# EAGLE board pick&place (EAGLE 9.4.2)
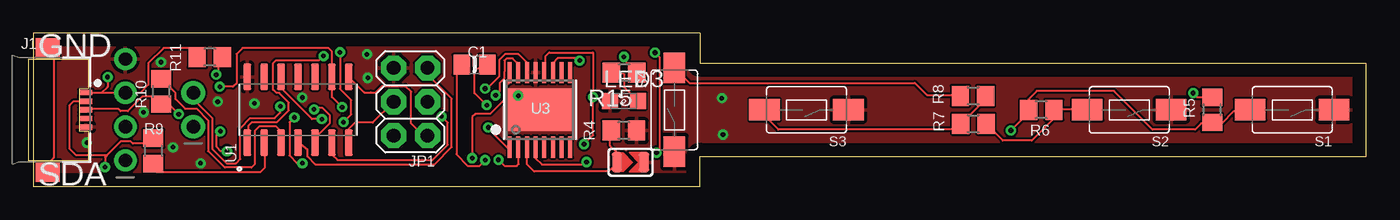
[diagram p0: board, top side]
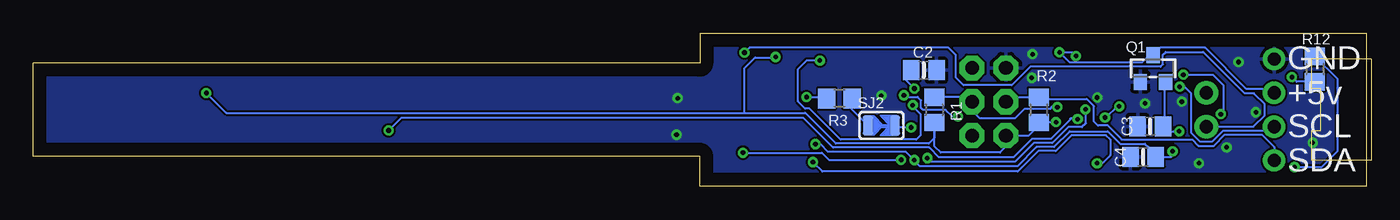
[diagram p1: board, bottom side, seen from below]

Size 100 x 11.5 mm. Coordinates in mm from the lower left corner, seen from the top.
Outline: 0,0 50,0 50,2.25 100,2.25 100,9.25 50,9.25 50,11.5 0,11.5 0,0
Copper layers (1*16): Top 0.035mm / dielectric 1.5mm / Bottom 0.035mm
Design rules "default": minimum track width 6mil, minimum drill 0.35mm, track to track 6mil, track to pad 6mil, pad to pad 6mil, via to via 6mil, smd to smd 6mil, copper to edge 40mil, drill to drill 6mil, minimum pad ring 10mil, minimum via ring 8mil, stop-mask expansion 4mil, vias tented up to drill 0mil, thermal gap 10mil
Net classes: 2 gnd: width 0.254 mm, drill 0.356 mm, clearance 0.127 mm

## Footprints (pad centres in the part's own frame; a part is rotated, then mirrored left to right if it is on the bottom)
0805-NO = smd 1.24 x 1.5: 1 -0.95,0; 2 0.95,0
GCT_USB3070-XX-X_REVE = smd 0.4 x 1: 1 -1.3,2.85; 2 -0.65,2.85; 3 0,2.85; 4 0.65,2.85; 5 1.3,2.85 | smd 1.6 x 1.8: 6 4.6,0; 7 -4.6,0
2X03 = drill 1.016 pad 1.88 octagon: 1 -2.54,-1.27; 2 -2.54,1.27; 3 0,-1.27; 4 0,1.27; 5 2.54,-1.27; 6 2.54,1.27
1X04_ROUND = drill 1 pad 1.676: 1 -3.81,0; 2 -1.27,0; 3 1.27,0; 4 3.81,0
1X02_ROUND = drill 1 pad 1.778: 1 -1.27,0; 2 1.27,0
SML0805 = smd 1.2 x 1.2: A 1.05,0; C -1.05,0
SOT23-WIDE = smd 1 x 1.2: 1 -0.95,-1; 2 0.95,-1; 3 0,1
R0805 = smd 1.3 x 1.5: 1 -0.95,0; 2 0.95,0
TACTILE-SWITCH-1101NE = smd 2.3 x 1.6: P$1 -3.15,0; P$2 3.15,0
SOLDERJUMPER_ARROW_NOPASTE = smd 0.762 x 1.524: 1 -1.016,0; 2 1.016,0
SOIC127P599X175-14N = smd 1.97 x 0.59: 1 -2.47,3.81; 2 -2.47,2.54; 3 -2.47,1.27; 4 -2.47,0; 5 -2.47,-1.27; 6 -2.47,-2.54; 7 -2.47,-3.81; 8 2.47,-3.81; 9 2.47,-2.54; 10 2.47,-1.27; 11 2.47,0; 12 2.47,1.27; 13 2.47,2.54; 14 2.47,3.81
HTSSOP16 = smd 0.3 x 1.6: 1 -2.275,-2.8; 2 -1.625,-2.8; 3 -0.975,-2.8; 4 -0.325,-2.8; 5 0.325,-2.8; 6 0.975,-2.8; 7 1.625,-2.8; 8 2.275,-2.8; 9 2.275,2.8; 10 1.625,2.8; 11 0.975,2.8; 12 0.325,2.8; 13 -0.325,2.8; 14 -0.975,2.8; 15 -1.625,2.8; 16 -2.275,2.8 | smd 4.8 x 3.2: PPAD 0,0

## Placement (x,y rotation side)
C1  0.1uF  [0805-NO]  33.1,9.13 0 top
C2  10µF  [0805-NO]  33.19,8.72 0 bottom
C3  10µF/16V  [0805-NO]  16.2,4.5 180 bottom
C4  10µF/16V  [0805-NO]  16.73,2.21 180 bottom
J1  USB3070-XX-X_REVE  [GCT_USB3070-XX-X_REVE]  1.09,5.75 270 top
JP1  [2X03]  28.3,6.35 90 top
JP3  [1X04_ROUND]  6.9,5.75 90 top
JP4  [1X02_ROUND]  12,5.75 90 top
LED3  [SML0805]  44.3,6.41 0 top
Q1  DMG3415U  [SOT23-WIDE]  16,8.85 0 bottom
R1  10k  [R0805]  32.4,5.75 270 bottom
R2  10k  [R0805]  24.57,5.75 270 bottom
R3  10k  [R0805]  39.52,6.6 180 bottom
R4  0.2Ω  [R0805]  44.3,4.19 180 top
R5  2.2k  [R0805]  88.44,5.75 90 top
R6  330  [R0805]  75.62,5.75 180 top
R7  680  [R0805]  70.53,4.7 0 top
R8  1k  [R0805]  70.5,6.8 0 top
R9  68  [R0805]  9,2.65 270 top
R10  68  [R0805]  9.61,7.13 90 top
R11  10k  [R0805]  13.24,9.71 180 top
R12  10k  [R0805]  3.84,8.81 270 bottom
R15  330  [R0805]  44.32,8.53 180 top
S1  Forward  [TACTILE-SWITCH-1101NE]  94.44,5.75 180 top
S2  Backward  [TACTILE-SWITCH-1101NE]  82.22,5.75 180 top
S3  Config  [TACTILE-SWITCH-1101NE]  58,5.75 180 top
S4  SWITCH-MOMENTARY-2-SMD-1101NE  [TACTILE-SWITCH-1101NE]  48.1,5.75 90 top
SJ1  ISENSEA  [SOLDERJUMPER_ARROW_NOPASTE]  44.8,1.8 0 top
SJ2  ISENSEA  [SOLDERJUMPER_ARROW_NOPASTE]  36.37,4.57 0 bottom
U1  ATTINY841-SSU  [SOIC127P599X175-14N]  19.86,5.75 90 top
U3  DRV8833PWPR  [HTSSOP16]  38,5.75 0 top

## Library data of the parts
C1-C4 JP3 JP4 Q1 U3 = microbuilder
J1 = USB3070-XX-X_REVE; AVAILABILITY: Warning; DESCRIPTION: USB - micro B USB 2.0 Receptacle Connector 5 Position Board Edge, Cutout; Surface Mount, Right Angle; MF: Global Connector Technology; MP: USB3070-30-A; PACKAGE: None; PRICE: None; PURCHASE-URL: https://pricing.snapeda.com/search/part/USB3070-30-A/?ref=eda
JP1 S1-S4 = SparkFun
LED3 = led
R1-R12 R15 = rcl
SJ1 SJ2 = microbuilder; BOM: EXCLUDE
U1 = ATTINY841-SSU; AVAILABILITY: Good; DESCRIPTION: AVR AVR® ATtiny Microcontroller IC 8-Bit 16MHz 8KB (8K x 8) FLASH 14-SOIC; MF: Microchip; MP: ATTINY841-SSU; PACKAGE: SOIC-14 Microchip; PRICE: None; PURCHASE-URL: https://pricing.snapeda.com/search/part/ATTINY841-SSU/?ref=eda

## Nets
!SLEEP: SJ2.2 U3.1
+5V: J1.1 JP1.2 JP3.3 Q1.3 R1.2 R2.2 R5.2 R11.2 R12.2 R15.1 U1.1
ADC1: R5.1 R6.2 S1.P$2 U1.12
AOUT1: JP4.1 U3.2
AOUT2: JP4.2 U3.4
ASEN: R4.2 SJ1.1 U3.3
D+: J1.3 R10.1 R11.1
D-: J1.2 R9.1 R12.1
ENC_A: U1.11
ENC_B: U1.10
GND: C2.2 C3.2 C4.2 J1.5 JP1.6 JP3.4 LED3.C Q1.1 R4.1 S1.P$1 S2.P$1 S3.P$1 S4.P$1 SJ1.2 U1.14 U3.13 U3.PPAD
IN1_A: U1.5 U3.16
IN2_A: U1.6 U3.15
MISO: JP1.1 U1.8
N$1: R3.1 SJ2.1
N$3: R9.2 U1.2
N$4: R10.2 U1.3
N$8: C1.2 U3.11
N$9: R7.1 R8.2 S3.P$2
N$12: LED3.A R15.2
N$14: R6.1 R7.2 S2.P$2
NFAULT: U3.8
RESET: JP1.5 U1.4
S4: R8.1 S4.P$2
SCL: JP1.3 JP3.2 R1.1 U1.9
SDA: JP1.4 JP3.1 R2.1 U1.7
SHIELD: J1.6 J1.7
VINT: C2.1 U3.14
VMOTOR: C1.1 C3.1 C4.1 Q1.2 R3.2 U3.12

## Tracks (layer width: path | path; a pad name or v marks a point on that pad's centre or on a via)
!SLEEP  (via drill 0.35)
  Top 0.152: U3.1 35.51,2.95 34.09,4.37 v34.13,4.42
  Bottom 0.152: v34.13,4.42 35.2,4.42 SJ2.2
+5V  (via drill 0.35)
  Top 0.152: 5.11,7.01 6.86,7.01 JP3.3 8.02,7.02 8.63,7.64 8.63,9.25 9.77,10.39 11.61,10.39 R11.2 | 5.11,7.01 3.96,7.01 J1.1 | v87.02,7.01 87.33,6.71 88.39,6.71 R5.2 | U1.1 16.15,3.35 16.15,4.56 16.41,4.82 18.28,4.82 19.17,5.7 19.17,6.28 18.44,7.01 18.24,7.01 17.98,7.27 17.96,7.27 17.96,9.21 18.2,9.45 21.42,9.45 v21.77,9.79 | v23.01,10.07 23.01,7.32 23.85,6.48 23.85,5.4 v23.27,4.82 | v5.57,8.21 5.57,7.47 5.11,7.01 | R15.1 44.31,9.49 v44.31,9.73
  Bottom 0.152: JP3.3 7.01,7.16 7.62,7.16 7.77,7.32 8.98,7.32 12.07,10.4 15.45,10.4 Q1.3 16.26,9.85 16.8,9.31 22.25,9.31 v23.01,10.07 22.04,10.07 v21.77,9.79 | 46.68,5.52 85.53,5.52 v87.02,7.01 | 46.68,5.52 42.11,5.52 42.11,5.53 39.79,3.21 32.82,3.21 32.4,3.63 R1.2 32.4,3.01 31.92,2.53 27.48,2.53 27.03,2.98 JP1.2 25.32,3.81 24.57,4.56 R2.2 24.56,4.82 v23.27,4.82 | R12.2 5.22,7.86 v5.57,8.21 | v44.31,9.73 44.37,9.67 45.85,9.67 46.68,8.85 46.68,5.52
ADC1  (via drill 0.35)
  Top 0.152: v21.65,5.05 20.91,5.05 18.59,7.37 18.59,8.08 U1.12 | v73.34,4.2 74.67,5.52 R6.2 74.68,5.79 74.68,6.55 75.29,7.16 81.08,7.16 83.97,4.27 87.17,4.27 87.63,4.72 88.39,4.72 R5.1 88.54,4.72 89.15,4.72 90.07,5.64 91.29,5.64 S1.P$2
  Bottom 0.152: v73.34,4.2 72.39,5.16 42.25,5.16 40,2.9 32.78,2.9 32.06,2.18 26.46,2.18 25.08,3.56 23.67,3.56 22.2,5.03 22.2,5.08 21.68,5.08 v21.65,5.05
AOUT1  (via drill 0.35)
  Top 0.152: v34.9,1.98 35.36,1.52 36.27,1.52 36.42,1.68 36.42,2.9 U3.2 | v46.75,2.52 46.98,2.75 46.98,9.7 v46.64,10.04 v46.64,10.05
  Bottom 0.152: v34.9,1.98 40.29,1.98 40.83,2.52 v46.75,2.52 | JP4.1 8.47,4.49 7.62,5.33 7.62,6.17 8.43,6.98 9.11,6.98 12.22,10.09 15.04,10.09 15.25,9.88 15.25,9.17 15.43,8.99 25.2,8.99 26.6,7.6 30.21,7.6 30.79,8.17 30.79,9.86 31.33,10.41 46.25,10.41 46.61,10.05 v46.64,10.05
AOUT2  (via drill 0.35)
  Top 0.152: U3.4 37.68,2.11 38.16,1.63 41.32,1.63 v41.51,1.81 | v20.19,1.73 19.78,1.73 19.21,2.3 19.21,4.8 v19.59,5.17 | v18.53,6.01 18.53,5.53 18.11,5.12 16.29,5.12 15.53,4.36 15.53,2.04 15.22,1.74 14.5,1.74 13.42,2.82 13.42,5.13 12,6.55 JP4.2
  Bottom 0.152: v41.51,1.81 40.8,1.11 26.14,1.11 24.6,2.64 23.29,2.64 22.11,3.83 19.52,3.83 19.2,3.51 19.2,2.32 19.79,1.73 v20.19,1.73 | v19.59,5.17 19.52,5.17 18.68,6.01 v18.53,6.01 | v18.53,6.01
ASEN
  Top 0.152: R4.2 43.28,4.12 43.28,3.05 43.74,2.59 43.74,1.83 SJ1.1 43.74,1.68 43.17,1.1 37.58,1.1 37.03,1.65 37.03,2.9 U3.3
D+  (via drill 0.35)
  Top 0.152: v10.91,5.42 10.24,6.09 9.7,6.09 R10.1 9.05,6.74 8.18,6.74 7.08,5.64 6.55,5.64 6.4,5.79 3.96,5.79 J1.3 | v13.72,8.38 13.91,8.57 13.91,9.42 R11.1
  Bottom 0.152: v10.91,5.42 10.71,5.62 10.71,7.6 11.49,8.38 v13.72,8.38
D-  (via drill 0.35)
  Top 0.152: 5.52,2.32 3.22,2.32 2.74,2.8 2.74,6.1 3.05,6.4 3.81,6.4 J1.2 | 5.52,2.32 6.55,3.35 7.32,3.35 7.47,3.2 9.3,3.2 9.6,3.5 R9.1 | 5.52,2.32 5.38,2.17 v5.38,1.44
  Bottom 0.152: R12.1 2.16,8.08 2.16,2.62 3.38,1.41 5.35,1.41 v5.38,1.44
GND  (via drill 0.35)
  other vias: 4.02,3.28 9.58,9.33 13.84,6.36 20.18,6.67 16.58,6.23 12.55,1.73 10.48,2.93 25.09,8.15 25.03,9.92 36.38,6.81 8.27,5.56 51.66,6.62 51.74,3.88
  pour Top: 0.08,11.52 100.05,11.52 100.05,-0.03 99.99,-0.09 0.08,-0.09
  pour Bottom: -0.02,11.5 100.11,11.5 100.11,-0.04 -0.02,-0.04
IN1_A  (via drill 0.35)
  Top 0.152: v21.05,5.78 21.14,5.87 21.72,5.87 22.26,5.33 22.26,4.75 21.03,3.52 21.03,3.35 U1.5 | U3.16 35.73,7.8 35.36,7.44 35.36,6.53 34.27,5.44 33.17,5.44 32.93,5.19 v32.93,2.11
  Bottom 0.152: v21.05,5.78 21.03,5.78 21.03,4.73 21.32,4.44 22.36,4.44 23.55,3.25 24.94,3.25 26.33,1.87 32.68,1.87 v32.93,2.11
IN2_A  (via drill 0.35)
  Top 0.152: U1.6 22.4,2.39 22.81,1.98 29.95,1.98 31.09,3.12 31.09,4.79 v30.62,5.25 | U3.15 36.27,8.69 36.27,9.3 35.96,9.61 35.51,9.61 35.35,9.45 35.35,8.6 35.34,8.59 35.34,8.1 35,7.77 35,7.16 v34.68,6.83
  Bottom 0.152: v30.62,5.25 30.64,5.27 31.09,5.27 31.56,5.73 33.25,5.73 33.28,5.77 33.28,5.78 33.4,5.9 33.4,6.45 33.66,6.71 34.55,6.71 v34.68,6.83
MISO
  Top 0.152: JP1.1 29.25,3.81 28.35,4.72 28.35,7.1 27.9,7.54 26.18,7.54 25.68,7.05 25.31,7.05 24.84,7.05 U1.8
N$1
  Bottom 0.152: SJ2.1 38.57,5.76 R3.1
N$2
  Bottom 0.305: 35.52,4.48 36.86,4.48
N$3
  Top 0.152: U1.2 17.37,3.2 17.37,1.39 17.07,1.09 9.24,1.09 9,1.33 R9.2
N$4
  Top 0.152: R10.2 10.68,7.01 10.68,6.54 11.39,5.84 12.24,5.84 13.12,4.96 13.12,2.66 14.37,1.41 16.37,1.41 16.61,1.65 16.61,4.15 16.96,4.5 18.22,4.5 18.59,4.12 18.59,3.35 U1.3
N$8  (via drill 0.35)
  Top 0.152: v34.01,6.1 33.1,7 33.1,8.78 C1.2 | U3.11 39.01,8.69 39.01,9.3 39.34,9.62 40.82,9.62 v40.99,9.45
  Bottom 0.152: v34.01,6.1 34.01,6 33.45,5.43 33.45,3.81 33.75,3.51 39.44,3.51 41.76,5.83 42.09,5.83 42.62,6.37 42.62,8.81 41.98,9.45 v40.99,9.45
N$9
  Top 0.152: R8.2 71.32,6.71 71.32,6.4 69.65,4.72 R7.1 69.49,4.57 69.19,4.27 55.89,4.27 54.85,5.31 S3.P$2
N$12
  Top 0.152: R15.2 44.31,8.47 44.31,7.45 LED3.A
N$14
  Top 0.152: R7.2 72.73,3.44 74.92,3.44 76.5,5.03 76.5,5.64 R6.1 76.66,5.79 78.94,5.79 S2.P$2
RESET
  Top 0.152: JP1.5 29.57,8.4 31.4,6.58 31.4,2.95 30.11,1.66 21.15,1.66 20.57,2.23 20.57,2.74 U1.4
S4
  Top 0.152: R8.1 69.49,6.86 67.06,6.86 66.14,7.77 49.23,7.77 48.16,8.84 S4.P$2
SCL  (via drill 0.35)
  Top 0.152: v23.16,5.94 22.4,6.71 22.4,8.08 U1.9 22.4,10.14 22.14,10.4 15.7,10.4 15.24,9.94 15.24,7.74 14.98,7.48 v13.99,7.48
  Bottom 0.152: v13.99,7.48 13.64,7.48 13.16,7 13.16,4.04 12.47,3.35 11.54,3.35 10.72,4.18 7.05,4.18 6.9,4.33 JP3.2 | v23.16,5.94 23.61,5.94 23.73,5.82 25.63,5.82 26.36,5.09 28.97,5.09 29.57,5.7 JP1.3 29.92,6.7 R1.1
SDA
  Top 0.152: U1.7 23.67,4.32 24.14,4.79 25.47,4.79 JP1.4
  Bottom 0.152: JP1.4 26.98,6.71 24.69,6.71 R2.1 24.44,6.57 20.97,6.57 20.43,6.03 20.43,4.85 20.13,4.55 19.38,4.55 18.34,3.51 13.06,3.51 12.59,3.05 11.42,3.05 10.59,3.88 7.82,3.88 6.89,2.95 JP3.1
SHIELD
  Top 0.152: J1.6 1.22,1.22 1.22,1.83 1.52,2.13 1.52,9.91 1.22,10.21 J1.7
VINT  (via drill 0.35)
  Top 0.152: v33.9,7.34 34.05,7.34 34.95,8.25 34.95,9.49 35.39,9.93 36.4,9.93 37.03,9.3 37.03,8.69 U3.14
  Bottom 0.152: v33.9,7.34 34.66,8.11 34.66,8.19 C2.1
VMOTOR  (via drill 0.35)
  Top 0.152: C1.1 31.74,8.72 31.74,2.4 32.63,1.5 33.44,1.5 v33.91,1.96 | v41.32,3.16 42.01,3.86 42.01,6.69 v41.99,6.71 41.99,10.06 38.71,10.06 38.41,9.75 38.41,8.69 U3.12 | v14.52,2.63 14.07,2.63 13.76,2.95 13.76,3.86 v14.03,4.13
  Bottom 0.152: Q1.2 15.09,7.77 15.09,4.66 C3.1 14.68,4.13 14.43,4.13 14.42,4.13 v14.03,4.13 | v41.32,3.16 40.96,3.16 40.39,2.6 34.54,2.6 v33.91,1.96 33.91,1.93 33.48,1.5 26.18,1.5 24.74,2.95 23.42,2.95 22.23,4.14 19.39,4.14 18.45,3.19 16.61,3.19 16.36,2.94 16.36,2.78 C4.1 14.63,2.21 14.52,2.32 v14.52,2.63 | v41.99,6.71 40.51,6.71 R3.2

## Text on the board
tNames: GND | SDA
bNames: GND | +5v | SCL | SDA